# EAGLE board PowerBoard (EAGLE 9.7.0)
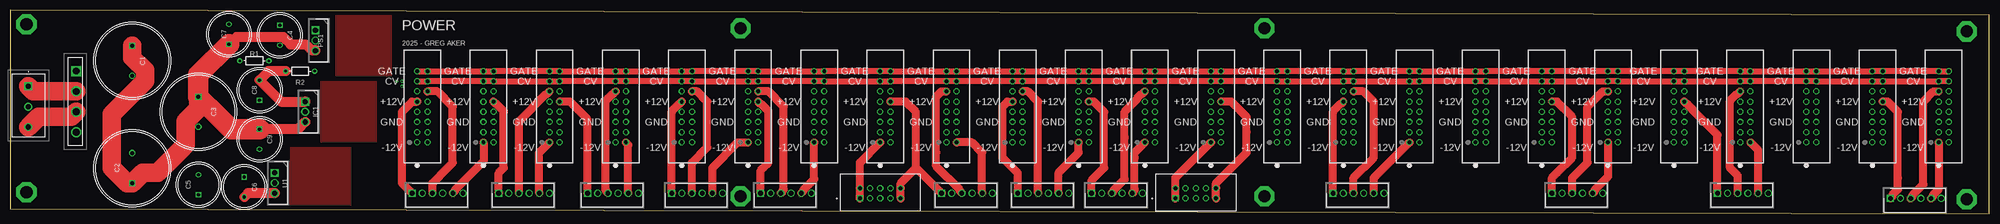
[diagram p0: board, top side]
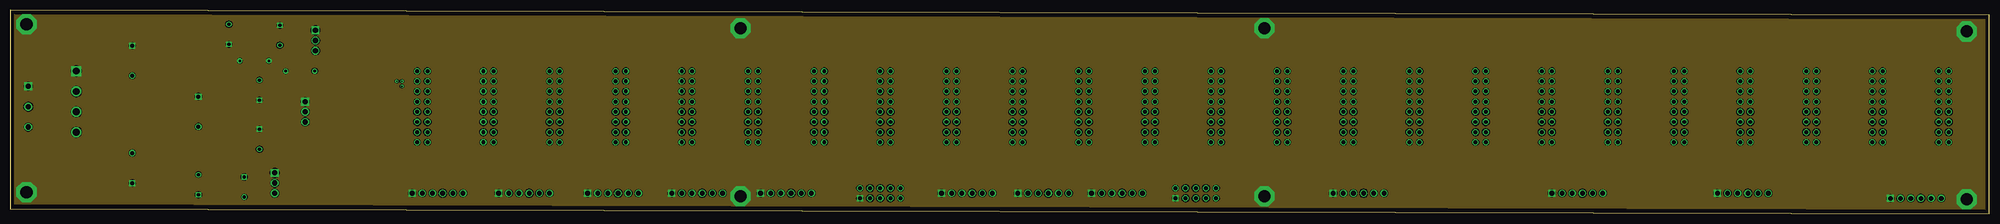
[diagram p1: board, inner layer Route2]
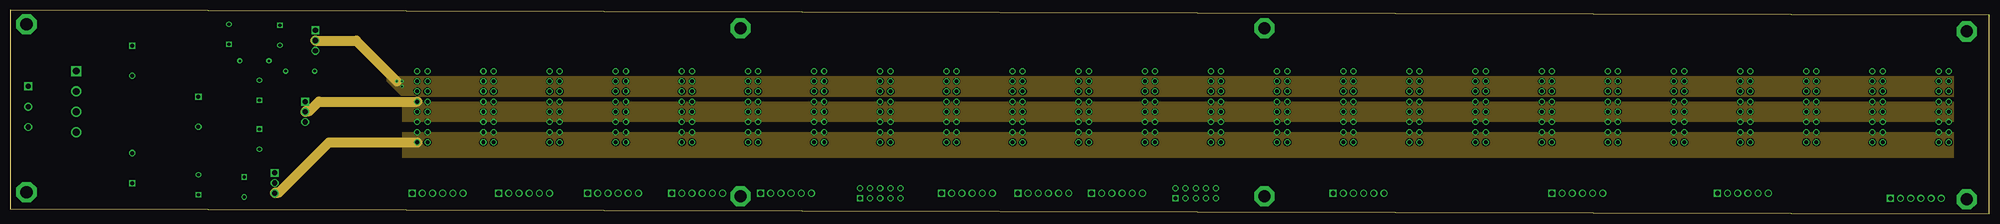
[diagram p2: board, inner layer Route15]
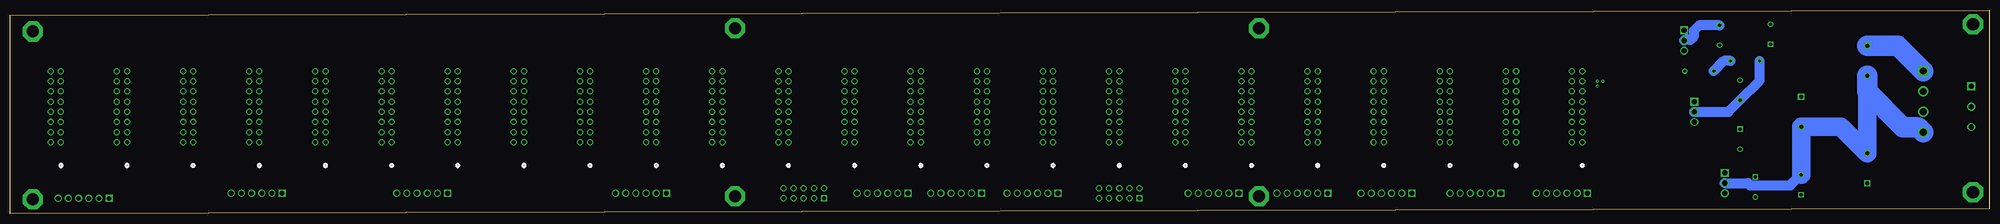
[diagram p3: board, bottom side, seen from below]

Size 494.03 x 50.8 mm. Coordinates in mm from the lower left corner, seen from the top.
Outline: 0,1.27 494.03,0 494.03,49.53 0,50.8 0,1.27
Copper layers (1+2*15+16): Top / Route2 / Route15 / Bottom
Stack-up 4 Layer Stack: Top SilkScreen Epoxy Ink / Top SolderMask SR:Green 0.0254mm Dk 4.3 / Top Surface Finish Lead-Free 0.02mm / Top CuFoil:007 0.035mm / Dielectric-1 Prepreg:001 0.064mm / Dielectric-2 Prepreg:001 0.064mm / Route2 User Defined 0.018mm / Dielectric-3 Core:066 0.711mm / Route15 User Defined 0.018mm / Dielectric-4 Prepreg:001 0.064mm / Dielectric-5 Prepreg:001 0.064mm / Bottom CuFoil:007 0.035mm / Bottom Surface Finish Lead-Free 0.02mm / Bottom SolderMask SR:Green 0.0254mm Dk 4.3 / Bottom SilkScreen Epoxy Ink
Design rules: minimum copper width 6mil, minimum drill size 0.35mm, copper clearance wire_polygon to wire_polygon 6mil, copper clearance wire_polygon to pad_smd 6mil, copper clearance wire_polygon to via 6mil, copper clearance pad_smd to pad_smd 6mil, copper clearance pad_smd to via 6mil, copper clearance via to via 6mil, copper clearance smd to pad (same net) 6mil, copper clearance smd to via (same net) 6mil, copper clearance smd to smd (same net) 6mil, restrict clearance 0mil, dimension clearance 40mil, via restrict clearance 0mil, drill distance 6mil, keepout clearance 0mil

## Footprints (pad centres in the part's own frame; a part is rotated, then mirrored left to right if it is on the bottom)
GBU8K = drill 1.67 pad 2.505 square: 1 0,0 | drill 1.67 pad 2.505: 2 -5.08,0; 3 -10.16,0; 4 -15.24,0
CAPPRD750W80D1825H4200 = drill 1 pad 1.5 square: 1 0,0 | drill 1 pad 1.5: 2 7.5,0
CAPPRD500W60D1025H1750 = drill 0.8 pad 1.2 square: 1 0,0 | drill 0.8 pad 1.2: 2 5,0
CONN16_SBH11-PBPC-D08-ST-BK_SU = drill 0.991 pad 1.499: 1 0,0; 2 0,-2.54; 3 2.54,0; 4 2.54,-2.54; 5 5.08,0; 6 5.08,-2.54; 7 7.62,0; 8 7.62,-2.54; 9 10.16,0; 10 10.16,-2.54; 11 12.7,0; 12 12.7,-2.54; 13 15.24,0; 14 15.24,-2.54; 15 17.78,0; 16 17.78,-2.54
TO254P470X1028X1955-3P = drill 1.29 pad 1.935 square: 1 0,0 | drill 1.29 pad 1.935: 2 2.54,0; 3 5.08,0
1161119 = drill 1.3 pad 1.95 square: 1 0,0 | drill 1.3 pad 1.95: 2 5.08,0; 3 10.16,0
SHDR6W66P0X254_1X6_1524X572X10 = drill 1.15 pad 1.725 square: 1 0,0 | drill 1.15 pad 1.725: 2 -2.54,0; 3 -5.08,0; 4 -7.62,0; 5 -10.16,0; 6 -12.7,0
SULLINS_SBH11-PBPC-D05-ST-BK = drill 1 square: 1 -5.08,-1.27 | drill 1: 2 -5.08,1.27; 3 -2.54,-1.27; 4 -2.54,1.27; 5 0,-1.27; 6 0,1.27; 7 2.54,-1.27; 8 2.54,1.27; 9 5.08,-1.27; 10 5.08,1.27
RESAD724W46L381D178B = drill 0.66 pad 1.26: 1 -3.62,0; 2 3.62,0

## Placement (x,y rotation side)
BR1  GBU8K  [GBU8K]  16.51,35.56 90 top
C1  UVY1V682MHD  [CAPPRD750W80D1825H4200]  30.48,41.91 270 top
C2  UVY1V682MHD  [CAPPRD750W80D1825H4200]  30.48,7.62 90 top
C3  UVY1V682MHD  [CAPPRD750W80D1825H4200]  46.99,29.21 270 top
C4  UEP1V101MPD  [CAPPRD500W60D1025H1750]  67.31,46.99 270 top
C5  UEP1V101MPD  [CAPPRD500W60D1025H1750]  46.99,4.7 90 top
C6  UEP1V101MPD  [CAPPRD500W60D1025H1750]  58.42,9.14 270 top
C7  UEP1V101MPD  [CAPPRD500W60D1025H1750]  54.61,42.25 90 top
C8  UEP1V101MPD  [CAPPRD500W60D1025H1750]  62.23,28.29 90 top
C9  UEP1V101MPD  [CAPPRD500W60D1025H1750]  62.23,21.08 270 top
E1  SBH11-PBPC-D08-ST-BKCONN16_SBH11-PBPC-D08-ST-BK_SU  [CONN16_SBH11-PBPC-D08-ST-BK_SU]  481.33,17.78 90 top
E2  SBH11-PBPC-D08-ST-BKCONN16_SBH11-PBPC-D08-ST-BK_SU  [CONN16_SBH11-PBPC-D08-ST-BK_SU]  365.76,17.78 90 top
E3  SBH11-PBPC-D08-ST-BKCONN16_SBH11-PBPC-D08-ST-BK_SU  [CONN16_SBH11-PBPC-D08-ST-BK_SU]  299.72,17.78 90 top
E4  SBH11-PBPC-D08-ST-BKCONN16_SBH11-PBPC-D08-ST-BK_SU  [CONN16_SBH11-PBPC-D08-ST-BK_SU]  464.82,17.78 90 top
E5  SBH11-PBPC-D08-ST-BKCONN16_SBH11-PBPC-D08-ST-BK_SU  [CONN16_SBH11-PBPC-D08-ST-BK_SU]  349.25,17.78 90 top
E6  SBH11-PBPC-D08-ST-BKCONN16_SBH11-PBPC-D08-ST-BK_SU  [CONN16_SBH11-PBPC-D08-ST-BK_SU]  283.21,17.78 90 top
E7  SBH11-PBPC-D08-ST-BKCONN16_SBH11-PBPC-D08-ST-BK_SU  [CONN16_SBH11-PBPC-D08-ST-BK_SU]  448.31,17.78 90 top
E8  SBH11-PBPC-D08-ST-BKCONN16_SBH11-PBPC-D08-ST-BK_SU  [CONN16_SBH11-PBPC-D08-ST-BK_SU]  332.74,17.78 90 top
E9  SBH11-PBPC-D08-ST-BKCONN16_SBH11-PBPC-D08-ST-BK_SU  [CONN16_SBH11-PBPC-D08-ST-BK_SU]  167.64,17.78 90 top
E10  SBH11-PBPC-D08-ST-BKCONN16_SBH11-PBPC-D08-ST-BK_SU  [CONN16_SBH11-PBPC-D08-ST-BK_SU]  415.29,17.78 90 top
E11  SBH11-PBPC-D08-ST-BKCONN16_SBH11-PBPC-D08-ST-BK_SU  [CONN16_SBH11-PBPC-D08-ST-BK_SU]  316.23,17.78 90 top
E12  SBH11-PBPC-D08-ST-BKCONN16_SBH11-PBPC-D08-ST-BK_SU  [CONN16_SBH11-PBPC-D08-ST-BK_SU]  151.13,17.78 90 top
E13  SBH11-PBPC-D08-ST-BKCONN16_SBH11-PBPC-D08-ST-BK_SU  [CONN16_SBH11-PBPC-D08-ST-BK_SU]  431.8,17.78 90 top
E14  SBH11-PBPC-D08-ST-BKCONN16_SBH11-PBPC-D08-ST-BK_SU  [CONN16_SBH11-PBPC-D08-ST-BK_SU]  250.19,17.78 90 top
E15  SBH11-PBPC-D08-ST-BKCONN16_SBH11-PBPC-D08-ST-BK_SU  [CONN16_SBH11-PBPC-D08-ST-BK_SU]  134.62,17.78 90 top
E16  SBH11-PBPC-D08-ST-BKCONN16_SBH11-PBPC-D08-ST-BK_SU  [CONN16_SBH11-PBPC-D08-ST-BK_SU]  398.78,17.78 90 top
E17  SBH11-PBPC-D08-ST-BKCONN16_SBH11-PBPC-D08-ST-BK_SU  [CONN16_SBH11-PBPC-D08-ST-BK_SU]  233.68,17.78 90 top
E18  SBH11-PBPC-D08-ST-BKCONN16_SBH11-PBPC-D08-ST-BK_SU  [CONN16_SBH11-PBPC-D08-ST-BK_SU]  118.11,17.78 90 top
E19  SBH11-PBPC-D08-ST-BKCONN16_SBH11-PBPC-D08-ST-BK_SU  [CONN16_SBH11-PBPC-D08-ST-BK_SU]  382.27,17.78 90 top
E20  SBH11-PBPC-D08-ST-BKCONN16_SBH11-PBPC-D08-ST-BK_SU  [CONN16_SBH11-PBPC-D08-ST-BK_SU]  217.17,17.78 90 top
E21  SBH11-PBPC-D08-ST-BKCONN16_SBH11-PBPC-D08-ST-BK_SU  [CONN16_SBH11-PBPC-D08-ST-BK_SU]  101.6,17.78 90 top
E22  SBH11-PBPC-D08-ST-BKCONN16_SBH11-PBPC-D08-ST-BK_SU  [CONN16_SBH11-PBPC-D08-ST-BK_SU]  266.7,17.78 90 top
E23  SBH11-PBPC-D08-ST-BKCONN16_SBH11-PBPC-D08-ST-BK_SU  [CONN16_SBH11-PBPC-D08-ST-BK_SU]  200.66,17.78 90 top
E24  SBH11-PBPC-D08-ST-BKCONN16_SBH11-PBPC-D08-ST-BK_SU  [CONN16_SBH11-PBPC-D08-ST-BK_SU]  184.15,17.78 90 top
IC1  LM1084IT-ADJ_NOPB  [TO254P470X1028X1955-3P]  73.66,27.94 270 top
J1  1161119  [1161119]  4.53,31.75 270 top
J3  640456-6  [SHDR6W66P0X254_1X6_1524X572X10]  100.33,5.08 180 top
J4  640456-6  [SHDR6W66P0X254_1X6_1524X572X10]  121.92,5.08 180 top
J5  640456-6  [SHDR6W66P0X254_1X6_1524X572X10]  165.1,5.08 180 top
J6  640456-6  [SHDR6W66P0X254_1X6_1524X572X10]  144.12,5.08 180 top
J7  640456-6  [SHDR6W66P0X254_1X6_1524X572X10]  187.3,5.08 180 top
J8  640456-6  [SHDR6W66P0X254_1X6_1524X572X10]  232.47,5.08 180 top
J9  640456-6  [SHDR6W66P0X254_1X6_1524X572X10]  426.11,5.08 180 top
J10  640456-6  [SHDR6W66P0X254_1X6_1524X572X10]  384.81,5.08 180 top
J11  640456-6  [SHDR6W66P0X254_1X6_1524X572X10]  469.29,3.81 180 top
J12  640456-6  [SHDR6W66P0X254_1X6_1524X572X10]  251.52,5.08 180 top
J13  640456-6  [SHDR6W66P0X254_1X6_1524X572X10]  269.9,5.08 180 top
J14  SBH11-PBPC-D05-ST-BK  [SULLINS_SBH11-PBPC-D05-ST-BK]  217.17,5.08 0 top
J15  SBH11-PBPC-D05-ST-BK  [SULLINS_SBH11-PBPC-D05-ST-BK]  295.91,5.08 0 top
J16  640456-6  [SHDR6W66P0X254_1X6_1524X572X10]  330.2,5.08 180 top
PS1  LM1084IT-5.0_NOPB  [TO254P470X1028X1955-3P]  76.2,45.72 270 top
R1  240R  [RESAD724W46L381D178B]  60.96,38.1 0 top
R2  2.1k  [RESAD724W46L381D178B]  72.39,35.56 0 top
U1  LM2990T-12_NOPB  [TO254P470X1028X1955-3P]  66.04,10.16 270 top

## Library data of the parts
BR1 = GBU8K; DESCRIPTION: Glass-Passivated Junction; Reliable Low-Cost Construction Utilizing Molded Plastic Technique; Ideal for Printed Circuit Bboard; UL certified, UL #E258596; Surge Overload Rating: 200 A peak; HEIGHT: 18.8mm; MANUFACTURER_NAME: onsemi; MANUFACTURER_PART_NUMBER: GBU8K; MOUSER_PART_NUMBER: 512-GBU8K; MOUSER_PRICE-STOCK: https://www.mouser.co.uk/ProductDetail/onsemi-Fairchild/GBU8K?qs=y841m8McC1Zm%2F8rGO9q6tw%3D%3D
C1-C3 = UVY1V682MHD; DESCRIPTION: Aluminum Electrolytic Capacitors - Radial Leaded 35volts 6800uF 18x40 20% 7.5LS; HEIGHT: 42mm; MANUFACTURER_NAME: Nichicon; MANUFACTURER_PART_NUMBER: UVY1V682MHD; MOUSER_PART_NUMBER: 647-UVY1V682MHD; MOUSER_PRICE-STOCK: https://www.mouser.co.uk/ProductDetail/Nichicon/UVY1V682MHD?qs=03MsczUQpDSvOkW22EYEfQ%3D%3D
C4-C9 = UEP1V101MPD; DESCRIPTION: Aluminum Electrolytic Capacitors - Radial Leaded 35volts 100uF 0.2L/S; HEIGHT: 17.5mm; MANUFACTURER_NAME: Nichicon; MANUFACTURER_PART_NUMBER: UEP1V101MPD; MOUSER_PART_NUMBER: 647-UEP1V101MPD; MOUSER_PRICE-STOCK: https://www.mouser.co.uk/ProductDetail/Nichicon/UEP1V101MPD?qs=bwWQAIe1w651dkL62BtnuQ%3D%3D
E1-E24 = 2025-05-25_01-48-17_Library; COPYRIGHT: Copyright (C) 2025 Ultra Librarian. All rights reserved.; MANUFACTURER_PART_NUMBER: SBH11-PBPC-D08-ST-BK; MFR_NAME: Sullins; TYPE: Headers, Male Pins
IC1 = LM1084IT-ADJ_NOPB; DESCRIPTION: 5A Fixed / Adjustable Output Linear Regulator; HEIGHT: 4.7mm; MANUFACTURER_NAME: Texas Instruments; MANUFACTURER_PART_NUMBER: LM1084IT-ADJ/NOPB; MOUSER_PART_NUMBER: 926-LM1084IT-ADJNOPB; MOUSER_PRICE-STOCK: https://www.mouser.co.uk/ProductDetail/Texas-Instruments/LM1084IT-ADJ-NOPB?qs=X1J7HmVL2ZFnaHQkkplutQ%3D%3D
J1 = 1161119; DESCRIPTION: Pluggable Terminal Blocks MKDSN 1,5/ 3-5,08 MCBD:+-S; HEIGHT: 10.15mm; MANUFACTURER_NAME: Phoenix Contact; MANUFACTURER_PART_NUMBER: 1161119; MOUSER_PART_NUMBER: 651-1161119; MOUSER_PRICE-STOCK: https://www.mouser.co.uk/ProductDetail/Phoenix-Contact/1161119?qs=Wj%2FVkw3K%252BMBiMbL7Hej3PA%3D%3D
J3-J13 J16 = 640456-6; DESCRIPTION: Body Features: Primary Product Color Natural | Configuration Features: Number of Rows 1 | Number of Columns 6 | PCB Mount Orientation Vertical | Number of Positions 6 | Contact Features: Contact Underplating Material Thickness 50 MICIN | Contact Underplating Material Thickness 1.27 MICM | Mating Square Post Dimension .64 MM | Contact Layout Inline | Contact Mating Area Length .295 INCH | Contact Mating Area Plating Material Thickness 3.81 MICM | Contact Base Material Copper Alloy | Contact Mating Area Plati; HEIGHT: 10.033mm; MANUFACTURER_NAME: TE Connectivity; MANUFACTURER_PART_NUMBER: 640456-6; MOUSER_PART_NUMBER: 571-6404566; MOUSER_PRICE-STOCK: https://www.mouser.co.uk/ProductDetail/TE-Connectivity-AMP/640456-6?qs=%2F35zJ5USjomb%252BGgX%252BBnrrQ%3D%3D
J14 J15 = SBH11-PBPC-D05-ST-BK; MANUFACTURER: Sullins Connector Solutions; MAXIMUM_PACKAGE_HEIGHT: 9.1mm; PARTREV: J; SNAPEDA_PN: SBH11-PBPC-D05-ST-BK; STANDARD: Manufacturer Recommendations
PS1 = LM1084IT-5.0_NOPB; DESCRIPTION: 5A Fixed / Adjustable Output Linear Regulator; HEIGHT: 4.7mm; MANUFACTURER_NAME: Texas Instruments; MANUFACTURER_PART_NUMBER: LM1084IT-5.0/NOPB; MOUSER_PART_NUMBER: 926-LM1084IT50NOPB; MOUSER_PRICE-STOCK: https://www.mouser.co.uk/ProductDetail/Texas-Instruments/LM1084IT-5.0-NOPB?qs=X1J7HmVL2ZG3q7gVwoDmcw%3D%3D
R1 R2 = Tinkercad; CATEGORY: Resistor; SUB-CATEGORY: Fixed
U1 = LM2990T-12_NOPB; DESCRIPTION: Texas Instruments LM2990T-12/NOPB, LDO Voltage Regulator, 1A, -12 V +/-5%, -26 0.3 Vin, 3-Pin TO-220; HEIGHT: 4.7mm; MANUFACTURER_NAME: Texas Instruments; MANUFACTURER_PART_NUMBER: LM2990T-12/NOPB; MOUSER_PART_NUMBER: 926-LM2990T-12/NOPB; MOUSER_PRICE-STOCK: https://www.mouser.co.uk/ProductDetail/Texas-Instruments/LM2990T-12-NOPB?qs=X1J7HmVL2ZF9B8sa0Zh01w%3D%3D

## Nets
+5V: C4.1 E1.11 E1.12 E2.11 E2.12 E3.11 E3.12 E4.11 E4.12 E5.11 E5.12 E6.11 E6.12 E7.11 E7.12 E8.11 E8.12 E9.11 E9.12 E10.11 E10.12 E11.11 E11.12 E12.11 E12.12 E13.11 E13.12 E14.11 E14.12 E15.11 E15.12 E16.11 E16.12 E17.11 E17.12 E18.11 E18.12 E19.11 E19.12 E20.11 E20.12 E21.11 E21.12 E22.11 E22.12 E23.11 E23.12 E24.11 E24.12 J3.3 J4.3 J5.3 J6.3 J7.3 J8.3 J9.3 J10.3 J11.3 J12.3 J13.3 J16.3 PS1.2
+12V: C8.1 E1.9 E1.10 E2.9 E2.10 E3.9 E3.10 E4.9 E4.10 E5.9 E5.10 E6.9 E6.10 E7.9 E7.10 E8.9 E8.10 E9.9 E9.10 E10.9 E10.10 E11.9 E11.10 E12.9 E12.10 E13.9 E13.10 E14.9 E14.10 E15.9 E15.10 E16.9 E16.10 E17.9 E17.10 E18.9 E18.10 E19.9 E19.10 E20.9 E20.10 E21.9 E21.10 E22.9 E22.10 E23.9 E23.10 E24.9 E24.10 IC1.2 J3.1 J4.1 J5.1 J6.1 J7.1 J8.1 J9.1 J10.1 J11.1 J12.1 J13.1 J14.9 J14.10 J15.9 J15.10 J16.1 R1.1
-12V: C6.2 E1.1 E1.2 E2.1 E2.2 E3.1 E3.2 E4.1 E4.2 E5.1 E5.2 E6.1 E6.2 E7.1 E7.2 E8.1 E8.2 E9.1 E9.2 E10.1 E10.2 E11.1 E11.2 E12.1 E12.2 E13.1 E13.2 E14.1 E14.2 E15.1 E15.2 E16.1 E16.2 E17.1 E17.2 E18.1 E18.2 E19.1 E19.2 E20.1 E20.2 E21.1 E21.2 E22.1 E22.2 E23.1 E23.2 E24.1 E24.2 J3.5 J4.5 J5.5 J6.5 J7.5 J8.5 J9.5 J10.5 J11.5 J12.5 J13.5 J14.1 J14.2 J15.1 J15.2 J16.5 U1.3
CV: E1.13 E1.14 E2.13 E2.14 E3.13 E3.14 E4.13 E4.14 E5.13 E5.14 E6.13 E6.14 E7.13 E7.14 E8.13 E8.14 E9.13 E9.14 E10.13 E10.14 E11.13 E11.14 E12.13 E12.14 E13.13 E13.14 E14.13 E14.14 E15.13 E15.14 E16.13 E16.14 E17.13 E17.14 E18.13 E18.14 E19.13 E19.14 E20.13 E20.14 E21.13 E21.14 E22.13 E22.14 E23.13 E23.14 E24.13 E24.14
GATE: E1.15 E1.16 E2.15 E2.16 E3.15 E3.16 E4.15 E4.16 E5.15 E5.16 E6.15 E6.16 E7.15 E7.16 E8.15 E8.16 E9.15 E9.16 E10.15 E10.16 E11.15 E11.16 E12.15 E12.16 E13.15 E13.16 E14.15 E14.16 E15.15 E15.16 E16.15 E16.16 E17.15 E17.16 E18.15 E18.16 E19.15 E19.16 E20.15 E20.16 E21.15 E21.16 E22.15 E22.16 E23.15 E23.16 E24.15 E24.16
GND: C4.2 C5.1 C6.1 C7.2 C9.2 E1.3 E1.4 E1.5 E1.6 E1.7 E1.8 E2.3 E2.4 E2.5 E2.6 E2.7 E2.8 E3.3 E3.4 E3.5 E3.6 E3.7 E3.8 E4.3 E4.4 E4.5 E4.6 E4.7 E4.8 E5.3 E5.4 E5.5 E5.6 E5.7 E5.8 E6.3 E6.4 E6.5 E6.6 E6.7 E6.8 E7.3 E7.4 E7.5 E7.6 E7.7 E7.8 E8.3 E8.4 E8.5 E8.6 E8.7 E8.8 E9.3 E9.4 E9.5 E9.6 E9.7 E9.8 E10.3 E10.4 E10.5 E10.6 E10.7 E10.8 E11.3 E11.4 E11.5 E11.6 E11.7 E11.8 E12.3 E12.4 E12.5 E12.6 E12.7 E12.8 E13.3 E13.4 E13.5 E13.6 E13.7 E13.8 E14.3 E14.4 E14.5 E14.6 E14.7 E14.8 E15.3 E15.4 E15.5 E15.6 E15.7 E15.8 E16.3 E16.4 E16.5 E16.6 E16.7 E16.8 E17.3 E17.4 E17.5 E17.6 E17.7 E17.8 E18.3 E18.4 E18.5 E18.6 E18.7 E18.8 E19.3 E19.4 E19.5 E19.6 E19.7 E19.8 E20.3 E20.4 E20.5 E20.6 E20.7 E20.8 E21.3 E21.4 E21.5 E21.6 E21.7 E21.8 E22.3 E22.4 E22.5 E22.6 E22.7 E22.8 E23.3 E23.4 E23.5 E23.6 E23.7 E23.8 E24.3 E24.4 E24.5 E24.6 E24.7 E24.8 J1.2 J3.4 J4.4 J5.4 J6.4 J7.4 J8.4 J9.4 J10.4 J11.4 J12.4 J13.4 J14.3 J14.4 J14.5 J14.6 J14.7 J14.8 J15.3 J15.4 J15.5 J15.6 J15.7 J15.8 J16.4 PS1.1 R2.2 U1.1
N$1: BR1.3 J1.3
N$2: BR1.2 J1.1
N$4: C8.2 IC1.1 R1.2 R2.1
UNREG_+V: BR1.1 C1.1 C2.1 C3.1 C7.1 C9.1 IC1.3 PS1.3
UNREG_-V: BR1.4 C1.2 C2.2 C3.2 C5.2 U1.2

## Tracks (layer width: path | path; a pad name or v marks a point on that pad's centre or on a via)
+5V  (via drill 0.35)
  Top 2.032: J10.3 389.89,8.89 393.7,12.7 393.7,26.67 397.51,30.48 E16.11 | J16.3 335.28,8.89 340.36,13.97 340.36,27.94 339.09,29.21 337.82,30.48 E8.12 | J13.3 275.49,5.59 275.49,5.92 278.13,8.56 278.13,19.05 278.13,25.4 279.4,26.67 281.29,28.56 281.29,28.73 282.42,29.86 282.59,29.86 E6.11 | J12.3 256.6,27.88 256.54,27.94 254,30.48 E14.12 | J8.3 237.04,5.59 237.04,5.92 231.14,11.82 231.14,15.24 231.14,29.21 232.41,30.48 E17.11 | J7.3 192.89,5.59 192.89,5.92 193.04,6.07 193.04,26.67 189.23,30.48 E24.12 | J5.3 170.18,12.7 173.99,16.51 173.99,27.94 171.45,30.48 E9.12 | J6.3 148.69,5.59 148.69,5.92 148.59,6.02 148.59,26.67 148.59,28.11 150.34,29.86 150.51,29.86 E12.11 | E15.11 134,29.86 133.83,29.86 127,23.03 J4.3 | J3.3 105.41,7.62 109.22,11.43 110.49,12.7 110.49,26.67 106.68,30.48 E21.12 | J11.3 474.88,4.32 474.88,4.65 477.52,7.29 477.52,27.94 480.06,30.48 E1.11 | J9.3 431.19,9.5 429.26,11.43 429.26,27.94 429.26,28.11 431.01,29.86 431.18,29.86 E13.11
  Route15 2.54: PS1.2 86.36,43.18 v96.52,33.02
  Bottom 2.54: C4.1 72.39,46.99 73.81,45.57 73.81,44.16 74.64,43.33 76.05,43.33 PS1.2
  other vias: 97.79,31.75 97.79,33.02
  pour Route15: 93.98,34.29 485.14,34.29 485.14,29.21 97.79,29.21 93.98,33.02
+12V
  Top 2.032: J10.1 384.81,8.89 386.08,10.16 389.89,13.97 389.89,24.13 386.08,27.94 E19.10 | J16.1 330.2,25.4 330.2,25.57 331.95,27.32 332.12,27.32 E8.9 | E3.10 304.8,27.94 307.34,25.4 308.61,24.13 308.61,20.32 308.61,15.24 300.99,7.62 J15.10 J15.9 | J13.1 269.9,8.28 273.05,11.43 273.05,25.4 270.51,27.94 E22.10 | J12.1 251.51,10.11 247.65,13.97 247.65,26.67 248.92,27.94 E14.9 | J8.1 226.12,11.43 | 226.12,11.43 226.06,11.43 226.06,25.4 223.52,27.94 E20.10 | J14.9 J14.10 222.25,7.56 226.12,11.43 | J7.1 187.3,10.77 187.96,11.43 189.23,12.7 189.23,25.4 189.23,25.57 187.48,27.32 187.31,27.32 E24.10 | J5.1 165.1,25.4 165.1,25.57 166.85,27.32 167.02,27.32 E9.9 | J6.1 144.12,23.52 143.51,24.13 139.7,27.94 E15.10 | J4.1 121.92,10.16 123.19,11.43 123.19,25.4 123.19,25.57 121.44,27.32 121.27,27.32 E18.10 | J3.1 97.79,7.62 97.79,11.43 97.79,25.4 100.33,27.94 E21.9 | J11.1 469.8,4.32 469.8,4.65 471.17,6.02 471.17,8.89 471.17,25.4 468.63,27.94 E4.10 | J9.1 426.11,19.66 424.18,21.59 419.75,26.02 419.75,26.19 418.62,27.32 418.45,27.32 E10.10
  Route15 2.54: IC1.2 73.81,25.55 74.65,25.55 77.04,27.94 E21.9
  Bottom 2.54: IC1.2 65.12,25.4 C8.1 57.34,33.18 R1.1
  pour Route15: 97.79,27.94 485.14,27.94 485.14,22.86 97.79,22.86
-12V
  Top 2.032: J10.5 395.48,5.59 395.48,5.92 398.78,9.22 E16.1 | J16.5 340.36,8.89 E5.1 | J15.1 J15.2 290.83,8.89 E3.1 | J13.5 280.57,5.59 280.57,5.92 280.67,6.02 280.67,13.97 280.67,15.24 E6.1 | J12.5 261.68,10.21 262.89,11.43 266.7,15.24 E22.1 | J8.5 242.62,15.18 242.57,15.24 240.03,17.78 E17.2 | J14.1 J14.2 212.09,12.7 E20.1 | J7.5 197.97,5.59 197.97,5.92 200.66,8.62 E23.1 | J5.5 175.26,11.43 181.61,17.78 E24.1 | J6.5 154.28,17.17 E12.2 | J4.5 132.08,15.24 E15.1 | J3.5 111,5.59 111,5.92 118.11,13.03 E18.1 | J11.5 479.96,4.32 479.96,4.65 481.33,6.02 E1.1 | J9.5 436.27,15.85 E13.2
  Top 2.54: U1.3 59.36,5.08 C6.2
  Route15 2.54: U1.3 66.19,5.23 67.03,5.23 79.58,17.78 E21.1
  pour Route15: 97.79,20.32 485.14,20.32 485.14,13.97 97.79,13.97
CV
  Top 1.524: E21.13 E21.14 E18.13 E18.14 E15.13 E15.14 E12.13 E12.14 E9.13 E9.14 E24.13 E24.14 E23.13 E23.14 E20.13 E20.14 E17.13 E17.14 E14.13 E14.14 E22.13 E22.14 E6.13 E6.14 E3.13 E3.14 E11.13 E11.14 E8.13 E8.14 E5.13 E5.14 E2.13 E2.14 E19.13 E19.14 E16.13 E16.14 E10.13 E10.14 E13.13 E13.14 E7.13 E7.14 E4.13 E4.14 E1.13 E1.14
GATE
  Top 1.524: E21.15 E21.16 E18.15 E18.16 E15.15 E15.16 E12.15 E12.16 E9.15 E9.16 E24.15 E24.16 E23.15 E23.16 E20.15 E20.16 E17.15 E17.16 E14.15 E14.16 E22.15 E22.16 E6.15 E6.16 E3.15 E3.16 E11.15 E11.16 E8.15 E8.16 E5.15 E5.16 E2.15 E2.16 E19.15 E19.16 E16.15 E16.16 E10.15 E10.16 E13.15 433.07,35.56 E13.16 E7.15 E7.16 E4.15 E4.16 E1.15 E1.16
GND  (via drill 3 pad 5)
  other vias: 4.07,47.27 4.07,5.36 182.25,4.32 182.25,46.23 313.06,46.23 313.06,4.32 488.32,3.53 488.32,45.44
  pour Top: 69.85,16.51 85.09,16.51 85.09,1.27 69.85,1.27
  pour Top: 77.47,33.02 91.44,33.02 91.44,17.78 77.47,17.78
  pour Top: 81.28,49.53 95.25,49.53 95.25,34.29 81.28,34.29
  pour Route2: -10.16,62.23 -10.16,-8.89 505.46,-8.89 505.46,60.96 506.73,62.23
N$1
  Top 4.572: J1.3 7.07,24.13 11.43,24.13 15.24,24.13 BR1.3
N$2
  Top 4.572: BR1.2 10.16,30.48 5.8,30.48 J1.1
N$4
  Top 2.54: IC1.1 67.58,27.94 C8.2 64.5,35.56 R2.1
  Bottom 2.54: R1.2 66.23,38.1 R2.1
UNREG_+V
  Top 2.54: IC1.3 71.88,21.08 C9.1 | PS1.3 76.05,40.79 75.21,40.79 73.75,42.25 69.99,42.25 68.17,44.07 56.43,44.07 C7.1
  Top 4.572: C1.1 30.48,38.93 33.67,35.73 33.67,33.09 30.48,29.89 25.4,24.82 25.4,11.43 29.21,7.62 C2.1 33.02,10.16 36.83,10.16 43.8,17.13 43.8,23.03 46.99,26.22 C3.1
  Top 5.08: C9.1 55.12,21.08 52.07,24.13 C3.1 46.99,34.63 C7.1
  Bottom 5.08: BR1.1 22.86,41.91 C1.1
UNREG_-V
  Bottom 2.54: C5.2 49.63,7.06 57.18,7.06 59.66,7.06 60.22,7.62 U1.2
  Bottom 4.572: 30.48,30.48 C1.2 C2.2 37.07,21.71 C3.2 C5.2
  Bottom 5.08: BR1.4 17.64,21.45 18.14,21.45 18.28,21.59 21.59,21.59 30.48,30.48 C1.2

## Text on the board
SilkscreenTop: POWER | 2025 - GREG AKER | GATE | GATE | GATE | GATE | GATE | GATE | GATE | GATE | GATE | GATE | GATE | GATE | GATE | GATE | GATE | GATE | GATE | GATE | GATE | GATE | GATE | GATE | GATE | GATE | CV | CV | CV | CV | CV | CV | CV | CV | CV | CV | CV | CV | CV | CV | CV | CV | CV | CV | CV | CV | CV | CV | CV | CV | +12V | +12V | +12V | +12V | +12V | +12V | +12V | +12V | +12V | +12V | +12V | +12V | +12V | +12V | +12V | +12V | +12V | +12V | +12V | +12V | +12V | +12V | +12V | +12V | GND | GND | GND | GND | GND | GND | GND | GND | GND | GND | GND | GND | GND | GND | GND | GND | GND | GND | GND | GND | GND | GND | GND | GND | -12V | -12V | -12V | -12V | -12V | -12V | -12V | -12V | -12V | -12V | -12V | -12V | -12V | -12V | -12V | -12V | -12V | -12V | -12V | -12V | -12V | -12V | -12V | -12V